# Altium PCB GroundStation.PcbDoc
Units mil, origin at the board's own origin, x right, y up, seen from the top; angles counter-clockwise.
Board outline 4957.4 x 4050 mil, 2 copper layers (Top Layer, Bottom Layer); 121 components, 93 nets, 417 pads, 95 vias.
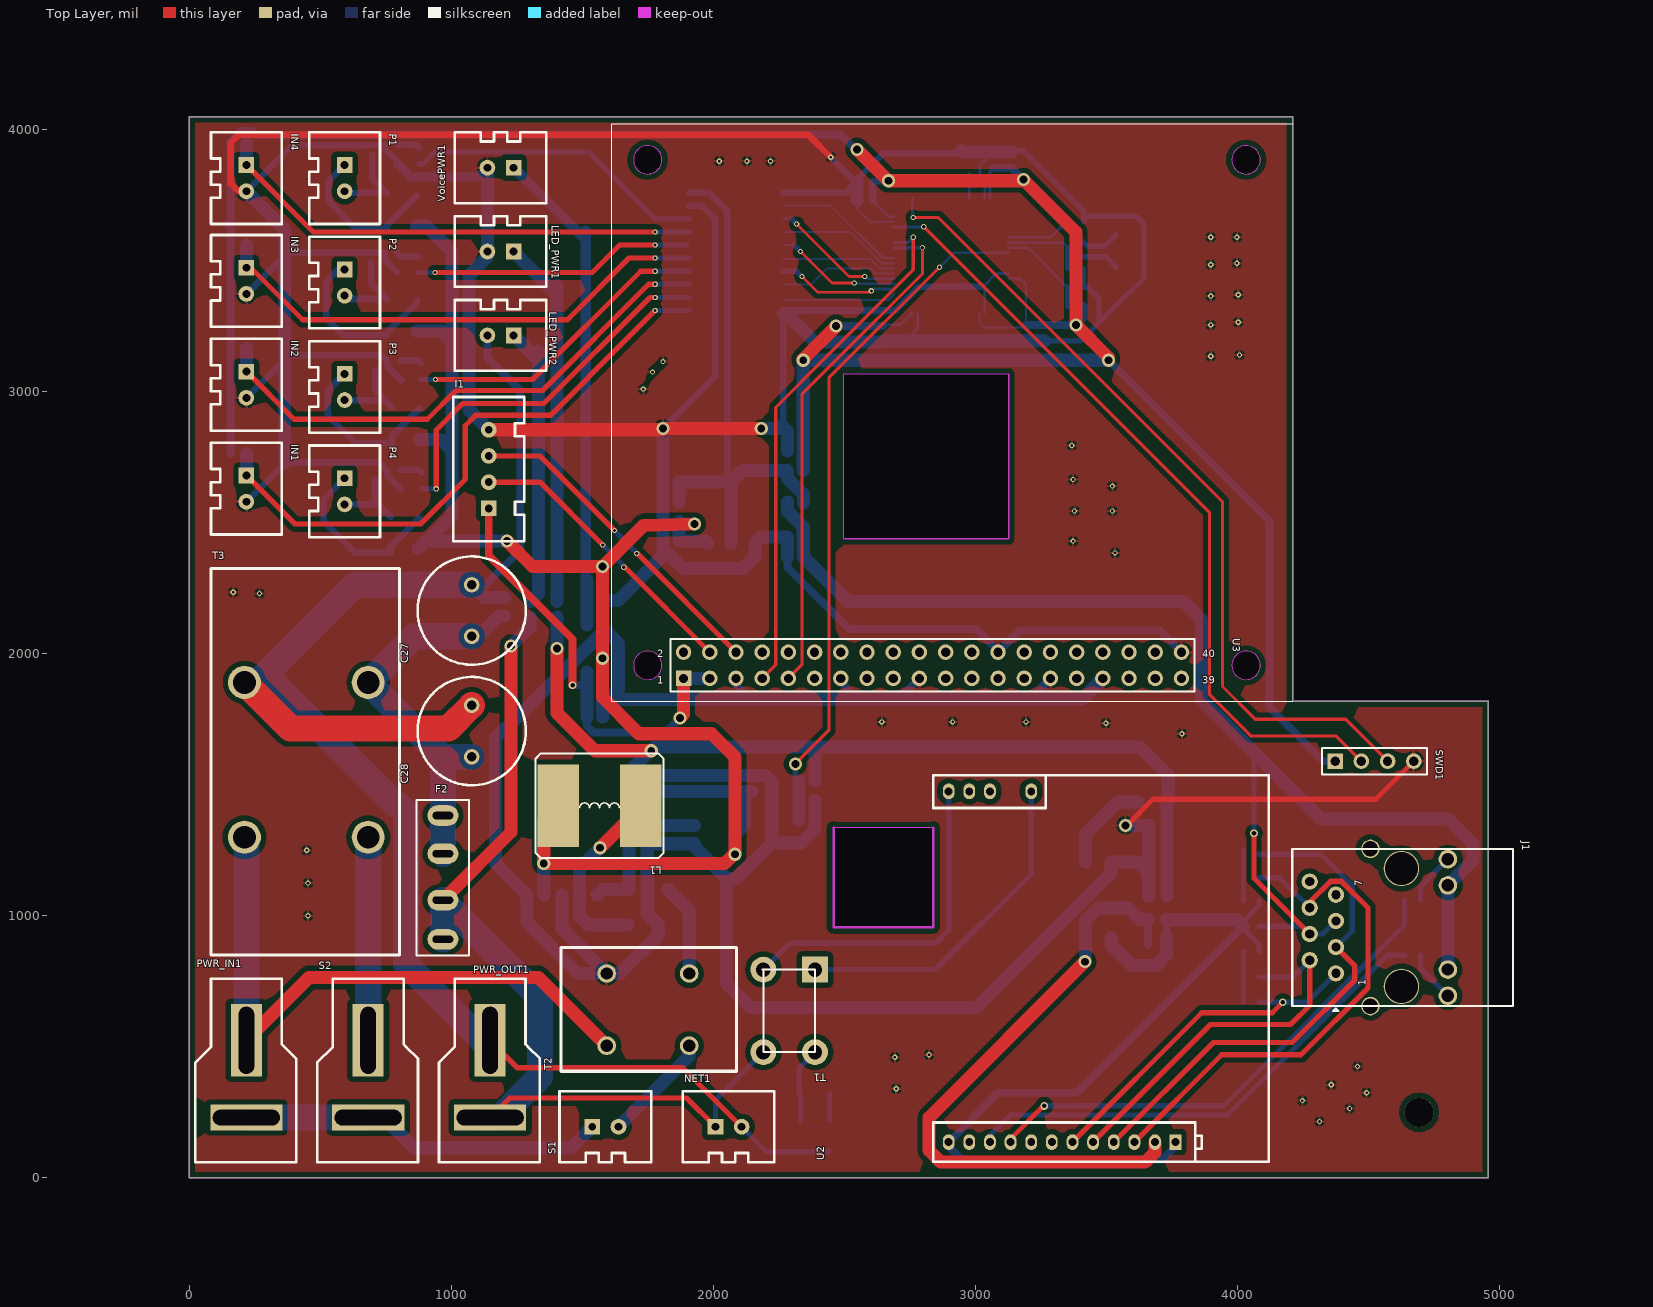
[diagram p0: Top Layer view]
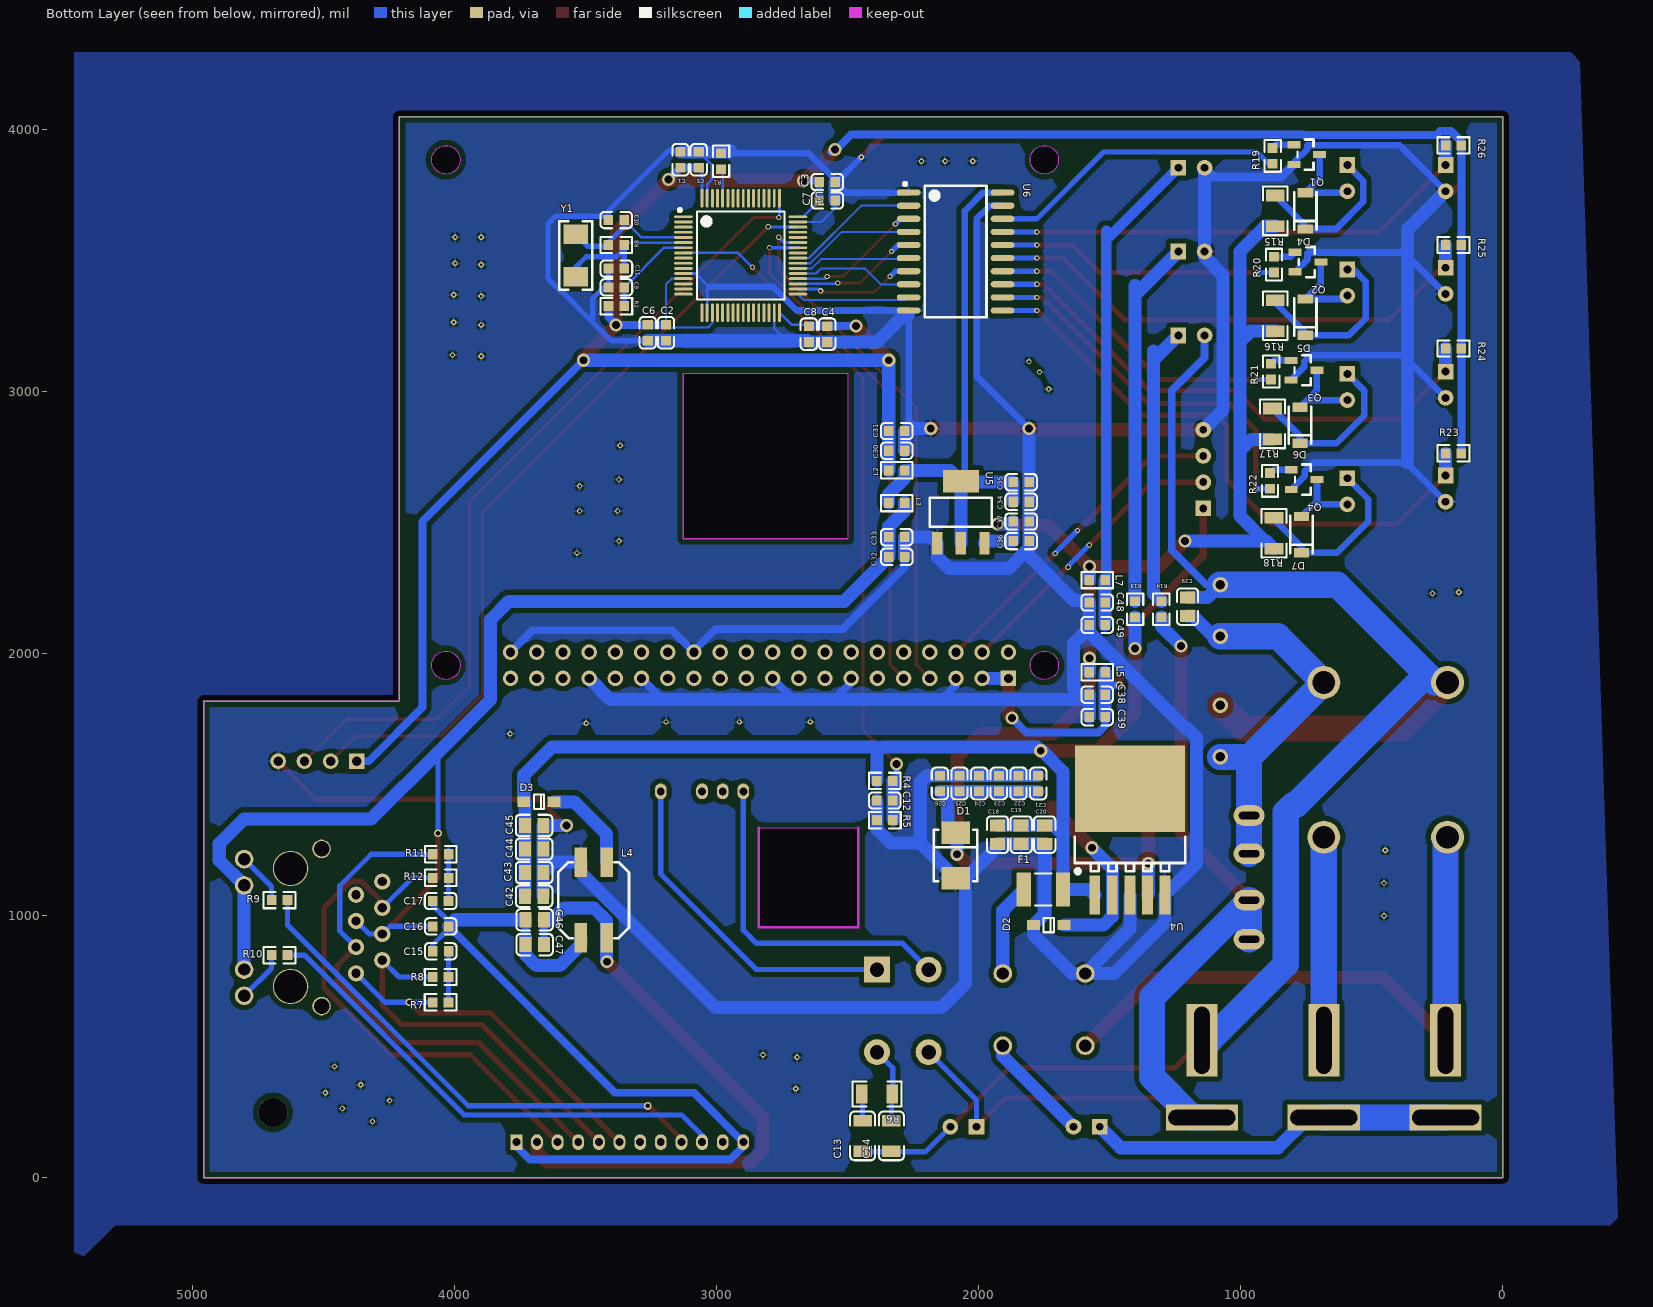
[diagram p1: Bottom Layer view, seen from below]
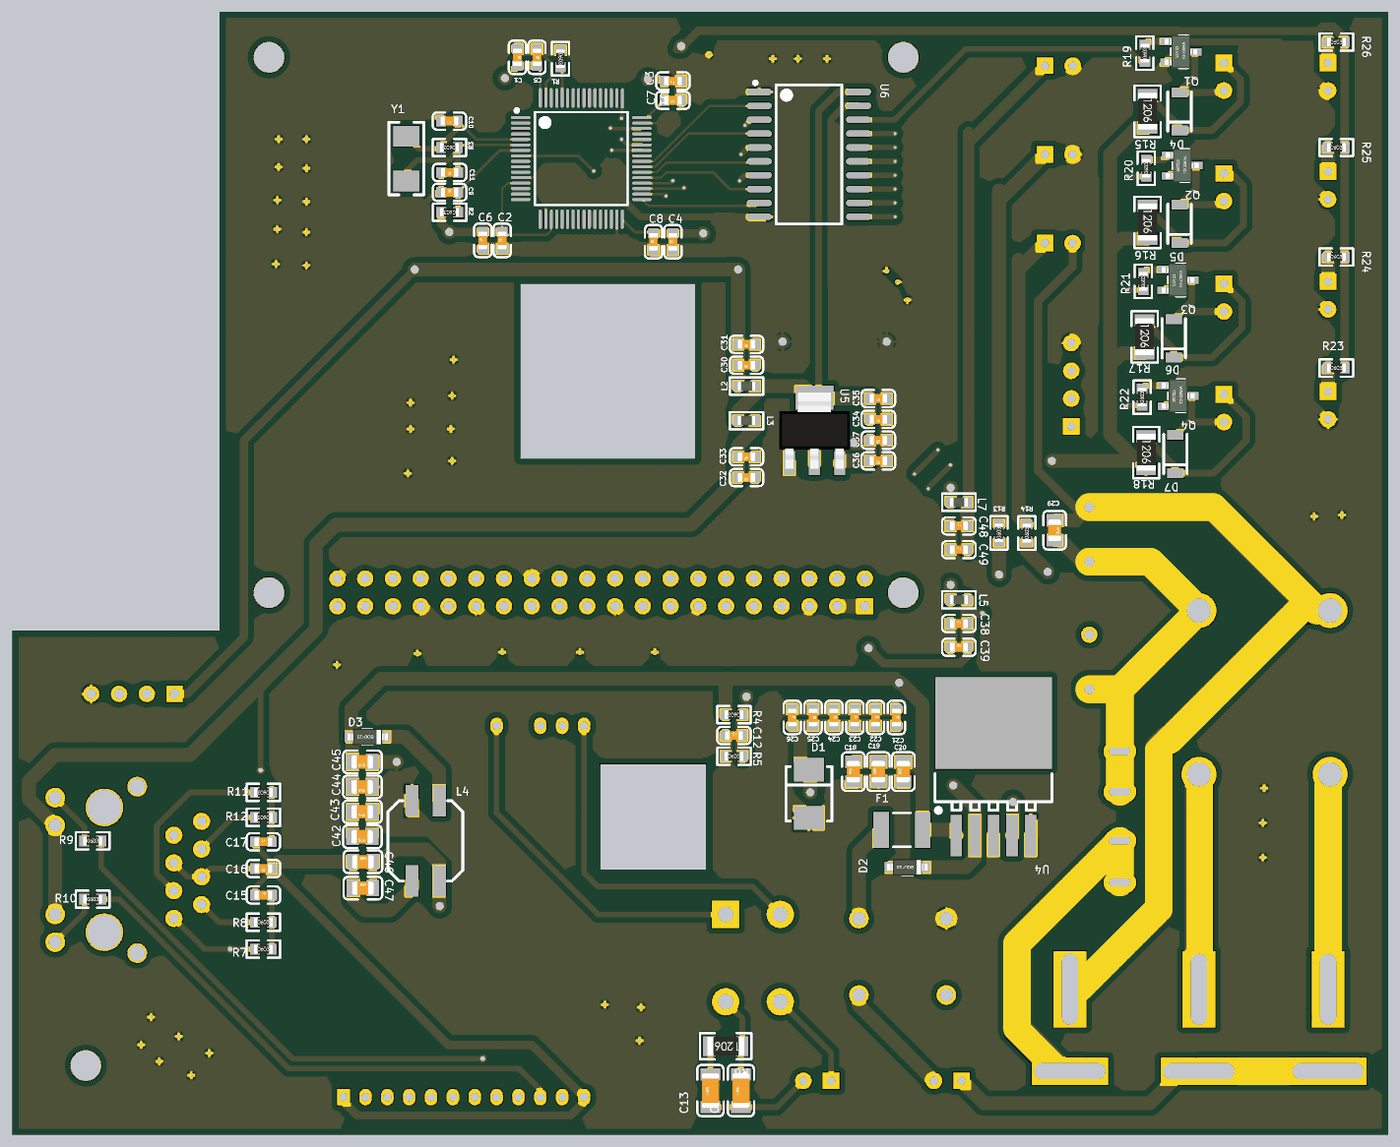
[diagram p2: 3D render of the assembled board from below, using the file's embedded part models]

## Layer stack, top to bottom
Top Solder: solder mask 0.4, Solder Resist, Dk 3.5
Top Layer: signal copper 1.4
Dielectric 1: dielectric 12.6, FR-4, Dk 4.8
Bottom Layer: signal copper 1.4
Bottom Solder: solder mask 0.4, Solder Resist, Dk 3.5

## Board outline
0,0 0,4050 4209.37,4050 4209.37,1818.07 4957.4,1818.07 4957.2,1817.87 4957.2,0
cut-out: 2496.77,3068.07 3126.69,3068.07 3126.69,2438.15 2498.62,2438.15 2496.77,2440
cut-out: 2458.39,956.42 2838.39,956.42 2838.39,1336.42 2458.39,1336.42

## Design rules (kind name [scope] priority, off if disabled: settings)
Clearance [All] p1: gap=8 ignorepadtopadclearanceinfootprint=FALSE
PolygonConnect [All] p1: connectstyle=Relief reliefconductorwidth=10 reliefentries=4 polygonreliefangle="90 Angle" airgapwidth=10
RoutingVias [All] p1: holewidth=28 width=50 viastyle="Through Hole" minholewidth=28 minwidth=50 maxholewidth=28 maxwidth=50
SolderMaskExpansion [All] p1: expansion=4
Width [All] p1: maxlimit=3937.01 minlimit=6 preferedwidth=20
30 further rules are at their usual default settings.

## Classes and differential pairs
component class MCU: C1 C2 C3 C4 C5 C6 C7 C8 C9 C10 C11 C12 R1 R2 R3 R4 R5 SWD1 U1 Y1
component class PLC_RaspberryPi: C13 C14 C15 C16 C17 I1 J1 NET1 R6 R7 R8 R9 R10 R11 R12 T1 U2 U3
component class Power: C18 C19 C20 C21 C22 C23 C24 C25 C26 C27 C28 C29 C30 C31 C32 C33 C34 C35 C36 C37 C38 C39 C42 C43 C44 C45 C46 C47 C48 C49 D1 D2 D3 F1 F2 L1 L2 L3 L4 L5 L7 LED_PWR1 LED_PWR2 PWR_IN1 PWR_OUT1 R13 R14 S1 S2 T2 T3 U4 U5 VoicePWR1
component class State: D4 D5 D6 D7 IN1 IN2 IN3 IN4 P1 P2 P3 P4 Q1 Q2 Q3 Q4 R15 R16 R17 R18 R19 R20 R21 R22 R23 R24 R25 R26 U6

## Components (designator, comment, footprint, x,y, rotation, side; value= is the part's Value field where it differs from the comment)
C1 "0.1uF (104) 10% 16V" 0603_C 3137.2,3885 r270 bottom
C2 "0.1uF (104) 10% 16V" 0603_C 3192.2,3225 r90 bottom
C3 "0.1uF (104) 10% 16V" 0603_C 2577.2,3800 r0 bottom
C4 "0.1uF (104) 10% 16V" 0603_C 2577.2,3220 r90 bottom
C5 "1uF (105) 10% 50V" 0603_C 3067.2,3885 r270 bottom
C6 "1uF (105) 10% 50V" 0603_C 3262.2,3225 r90 bottom
C7 "1uF (105) 10% 50V" 0603_C 2577.2,3730 r0 bottom
C8 "1uF (105) 10% 50V" 0603_C 2647.2,3220 r90 bottom
C9 "1uF (105) 10% 50V" 0603_C 3381.57,3398.33 r180 bottom
C10 "20pF 10%" 0603_C 3382.2,3655 r0 bottom
C11 "20pF 10%" 0603_C 3381.57,3470 r0 bottom
C12 "0.1uF (104) 10% 50V" 0603_C 2357.2,1440 r180 bottom
C13 "0.01uF (103) 10% 200V" 1206_C 2442.2,160 r90 bottom
C14 "0.01uF (103) 10% 200V" 1206_C 2332.2,160 r90 bottom
C15 "100nF(104) 10% 50V" 0603_C 4052.2,865 r180 bottom
C16 "100nF(104) 10% 50V" 0603_C 4052.2,960 r0 bottom
C17 "100nF(104) 10% 50V" 0603_C 4052.52,1056.67 r180 bottom
C18 "22uF (226) 20% 25V" 0805_C 1927.2,1310 r90 bottom
C19 "22uF (226) 20% 25V" 0805_C 1837.2,1309.96 r90 bottom
C20 "0.1uF (104) 10% 50V" 0805_C 1747.2,1310 r90 bottom
C21 "10uF (106) 10% 10V" 0603_C 1772.2,1505 r270 bottom
C22 "10uF (106) 10% 10V" 0603_C 1847.2,1505 r270 bottom
C23 "10uF (106) 10% 10V" 0603_C 1922.2,1505 r270 bottom
C24 "10uF (106) 10% 10V" 0603_C 1997.2,1505 r270 bottom
C25 "10uF (106) 10% 10V" 0603_C 2072.2,1505 r270 bottom
C26 "0.1uF (104) 10% 16V" 0603_C 2147.2,1505 r270 bottom
C27 "Cap Pol1" RB5-10.5 1077.2,2165 r90 top
C28 "Cap Pol1" RB5-10.5 1077.2,1705 r90 top
C29 "0.1uF (104) 10% 50V" 0805_C 1202.2,2180 r270 bottom
C30 "10uF (106) 10% 10V" 0603_C 2311.89,2775 r0 bottom
C31 "100nF (104) 10% 50V" 0603_C 2311.89,2850 r0 bottom
C32 "10uF (106) 10% 10V" 0603_C 2311.89,2370 r0 bottom
C33 "100nF (104) 10% 50V" 0603_C 2312.2,2445 r0 bottom
C34 "10uF (106) 10% 10V" 0603_C 1837.2,2580 r0 bottom
C35 "100nF (104) 10% 50V" 0603_C 1837.2,2655 r0 bottom
C36 "10uF (106) 10% 10V" 0603_C 1837.2,2430 r0 bottom
C37 "100nF (104) 10% 50V" 0603_C 1837.2,2505 r0 bottom
C38 "10uF (106) 10% 10V" 0603_C 1546.89,1843.75 r180 bottom
C39 "100nF (104) 10% 50V" 0603_C 1546.89,1758.12 r180 bottom
C42 "0.1uF (104) 10% 50V" 0805_C 3695.83,1075 r0 bottom
C43 "22uF (226) 20% 25V" 0805_C 3695.83,1165 r0 bottom
C44 "22uF (226) 20% 25V" 0805_C 3695.83,1255 r0 bottom
C45 "22uF (226) 20% 25V" 0805_C 3695.83,1345 r0 bottom
C46 "22uF (226) 20% 25V" 0805_C 3693.58,985 r180 bottom
C47 "0.1uF (104) 10% 50V" 0805_C 3693.58,890 r180 bottom
C48 "10uF (106) 10% 10V" 0603_C 1546.89,2195.62 r180 bottom
C49 "100nF (104) 10% 50V" 0603_C 1546.89,2110 r180 bottom
D1 "P6SMB6.8CA" SMB(DO-214AA)_S1 2087.2,1230 r270 bottom
D2 "B5819W  SL" SOD-123 1732.2,965 r0 bottom
D3 "B5819W  SL" SOD-123 3677.2,1435 r0 bottom
D4 "LL4148 LL-34 1206" LL-34 752.2,3690 r90 bottom
D5 "LL4148 LL-34 1206" LL-34 752.2,3285 r90 bottom
D6 "LL4148 LL-34 1206" LL-34 772.99,2872.13 r90 bottom
D7 "LL4148 LL-34 1206" LL-34 767.2,2454.72 r90 bottom
F1 "0.5A 1812" 1812 1752.2,1100 r180 bottom
F2 "20A" Fuse_Small 967.2,1382.83 r270 top
I1 "Header 4" XH2.54_4P 1142.2,2555 r90 top
IN1 "Header 2" XH2.54_2P 217.2,2680 r270 top
IN2 "Header 2" XH2.54_2P 217.2,3076.67 r270 top
IN3 "Header 2" XH2.54_2P 217.2,3473.33 r270 top
IN4 "Header 2" XH2.54_2P 217.2,3865 r270 top
J1 "RJ45_HR911105A" RJ45_3 4625.04,955.63 r0 top locked
L1 "Inductor" L1050(10x10x4) 1564.72,1420 r180 top
L2 "Inductor" 0603_L 2311.89,2700 r0 bottom
L3 "Inductor" 0603_L 2312.2,2575 r180 bottom
L4 "B82793S0513N201" B82793S0513N201_Yes 3418.78,1205 r270 bottom
L5 "Inductor" 0603_L 1546.89,1929.37 r180 bottom
L7 "Inductor" 0603_L 1546.89,2281.25 r180 bottom
LED_PWR1 "Header 2" XH2.54_2P 1237.2,3535 r180 top
LED_PWR2 "Header 2" XH2.54_2P 1237.2,3215 r180 top
NET1 "Header 2" XH2.54_2P 2007.2,195 r0 top
P1 "Header 2" XH2.54_2P 592.2,3865 r270 top
P2 "Header 2" XH2.54_2P 592.2,3466.67 r270 top
P3 "Header 2" XH2.54_2P 592.2,3068.33 r270 top
P4 "Header 2" XH2.54_2P 592.2,2670 r270 top
PWR_IN1 "Header 2" T型口 227.2,525 r0 top
PWR_OUT1 "Header 2" T型口 1157.2,525 r0 top
Q1 "SS8050 Y1" SOT-23(SOT-23-3) 747.2,3905 r0 bottom
Q2 "SS8050 Y1" SOT-23(SOT-23-3) 742.2,3495 r0 bottom
Q3 "SS8050 Y1" SOT-23(SOT-23-3) 757.99,3082.13 r0 bottom
Q4 "SS8050 Y1" SOT-23(SOT-23-3) 757.2,2664.72 r0 bottom
R1 "100K(104),1%" 0603_R 2982.2,3880 r270 bottom
R2 "10K(103),1%" 0603_R 3381.57,3326.67 r0 bottom
R3 "1M(105),1%" 0603_R 3382.2,3560 r0 bottom
R4 "47K(473),1%" 0603_R 2357.2,1515 r0 bottom
R5 "10KΩ (1002) ±1%" 0603_R 2356.89,1365 r180 bottom
R6 "100K(104),1%" 1206_R 2387.2,320 r0 bottom
R7 "49.9Ω (49R9) ±1%" 0603_R 4052.52,670 r180 bottom
R8 "49.9Ω (49R9) ±1%" 0603_R 4052.52,766.67 r180 bottom
R9 "1KΩ (1001) ±1%" 0603_R 4667.2,1060 r180 bottom
R10 "1KΩ (1001) ±1%" 0603_R 4667.2,850 r180 bottom
R11 "49.9Ω (49R9) ±1%" 0603_R 4052.2,1235 r0 bottom
R12 "49.9Ω (49R9) ±1%" 0603_R 4052.2,1145 r0 bottom
R13 "2KΩ (2001) ±1%" LC-0603_R 1402.2,2170.31 r90 bottom
R14 "2KΩ (2001) ±1%" LC-0603_R 1302.2,2170 r90 bottom
R15 "10Ω (10R0) ±1%" 1206_R 867.2,3690 r270 bottom
R16 "10Ω (10R0) ±1%" 1206_R 867.2,3290 r270 bottom
R17 "10Ω (10R0) ±1%" 1206_R 877.99,2877.13 r270 bottom
R18 "10Ω (10R0) ±1%" 1206_R 872.2,2460 r270 bottom
R19 "1KΩ (1001) ±1%" 0603_R 877.2,3900 r90 bottom
R20 "1KΩ (1001) ±1%" 0603_R 872.2,3485.31 r90 bottom
R21 "1KΩ (1001) ±1%" 0603_R 882.99,3077.13 r90 bottom
R22 "1KΩ (1001) ±1%" 0603_R 887.2,2659.72 r90 bottom
R23 "5.1KΩ (5101) ±1%" LC-0603_R 187.2,2765 r180 bottom
R24 "5.1KΩ (5101) ±1%" LC-0603_R 187.2,3165 r180 bottom
R25 "5.1KΩ (5101) ±1%" LC-0603_R 187.2,3560 r180 bottom
R26 "5.1KΩ (5101) ±1%" LC-0603_R 187.2,3940 r180 bottom
S1 "SW-SPST" XH2.54_2P 1537.2,195 r0 top
S2 "SW-SPST" T型口 692.2,525 r0 top
SWD1 "Header 4" HDR1X4 4372.2,1590 r0 top
T1 "Trans" SW-80 2387.2,795 r270 top
T2 "Trans" UU9.8 1907.17,504.41 r90 top
T3 "Trans" 20A共模电感 682.2,1300 r90 top
U1 "STM32F103RET6" LQFP-64_10x10x05P 2907.2,3520 r270 bottom
U2 "LAN Adapter" "LAN Adapter" 3763.39,136.42 r90 top locked
U3 "Raspberry3B" HDR2X20 1885.63,1906.07 r0 top locked
U4 "LM2596" TO-263-5 1422.2,1079.49 r270 bottom
U5 "AMS1117-3.3" SOT-223 2067.2,2540 r270 bottom
U6 "SN74HC244" SOIC-20_300mil 2087.2,3535 r270 bottom
VoicePWR1 "Header 2" XH2.54_2P 1237.2,3855 r180 top
Y1 "8MHz ±20ppm 20pF" SMD-5032_2P 3537.2,3520 r90 bottom

## Footprints (in the part's own frame and the unit in brackets; to place one, negate y for a bottom-side part, rotate by r counter-clockwise, add the part's x,y. Pads: shape width x height; smd on the part's side, far side on the other; paste and mask are expansions set on the pad)
20A共模电感 [mm]
  round 3.2 hole 2.2: 1(0,12) 2(15,12) 3(0,0) 4(15,0)
  silkscreen extent -11.43,-3.05 26.04,15.24
0603_C [mm]
  rect 0.93x0.98 smd: 1(-0.77,0) 2(0.77,0)
  silkscreen extent -1.53,-0.79 1.54,0.79, body extent -0.8,-0.4 0.8,0.4, height 0.3
0603_L [mm]
  rect 0.93x0.98 smd: 1(-0.77,0) 2(0.77,0)
  silkscreen extent -1.53,-0.79 1.54,0.79, body extent -0.8,-0.41 0.8,0.41, height 0.46
0603_R [mm]
  rect 0.93x0.98 smd: 1(-0.77,0) 2(0.77,0)
  silkscreen extent -1.53,-0.79 1.54,0.79, body extent -0.85,-0.4 0.85,0.4, height 0.56
0805_C [mm]
  rect 1.16x1.47 smd: 1(-0.89,0) 2(0.89,0)
  silkscreen extent -1.77,-1.04 1.77,1.04, body extent -1,-0.63 1,0.63, height 0.77
1206_C [mm]
  rect 1.13x1.8 smd: 1(-1.49,0) 2(1.49,0)
  silkscreen extent -2.36,-1.2 2.35,1.2, body extent -1.6,-0.81 1.6,0.79, height 1
1206_R [mm]
  rect 1.13x1.8 smd: 1(-1.49,0) 2(1.49,0)
  silkscreen extent -2.36,-1.2 2.35,1.2, body extent -1.7,-0.86 1.65,0.87, height 0.85
1812 [mm] "Chip Capacitor, Body 4.5x3.2mm, IPC High Density"
  rect 1.4x3.3 smd: 1(-1.9,0) 2(1.9,0)
  silkscreen extent -0.8,-1.55 0.8,1.55, body extent -2.4,-1.7 2.4,1.7, height 1.4
B82793S0513N201_Yes [mm]
  rect 2.85x1.2 smd: 1(0,0) 2(7.35,0) 3(7.35,-2.5) 4(0,-2.5)
  silkscreen extent 0,-4.7 7.37,2.16
Fuse_Small [mm]
  oval 2x3 hole 0.7 slot 2 at 90 deg: 1(0,0) 1(3.7,0) 2(8.2,0) 2(12,0)
  silkscreen extent -1.52,-2.54 13.59,2.54
HDR1X4 [mm] "Connector; Header; 4 Position"
  rect 1.5x1.5 hole 0.9: 1(0,0)
  round 1.5 hole 0.9: 2(2.54,0) 3(5.08,0) 4(7.62,0)
  silkscreen extent -1.27,-1.27 8.89,1.27
HDR2X20 [mm] "Connector; Header; 20x2 Position"
  rect 1.5x1.5 hole 0.9: 1(0,0)
  round 1.5 hole 0.9: 2(0,2.54) 3(2.54,0) 4(2.54,2.54) 5(5.08,0) 6(5.08,2.54) 7(7.62,0) 8(7.62,2.54) 9(10.16,0) 10(10.16,2.54) 11(12.7,0) 12(12.7,2.54) 13(15.24,0) 14(15.24,2.54) 15(17.78,0) 16(17.78,2.54) 17(20.32,0) 18(20.32,2.54) 19(22.86,0) 20(22.86,2.54) 21(25.4,0) 22(25.4,2.54) 23(27.94,0) 24(27.94,2.54) 25(30.48,0) 26(30.48,2.54) 27(33.02,0) 28(33.02,2.54) 29(35.56,0) 30(35.56,2.54) 31(38.1,0) 32(38.1,2.54) 33(40.64,0) 34(40.64,2.54) 35(43.18,0) 36(43.18,2.54) 37(45.72,0) 38(45.72,2.54) 39(48.26,0) 40(48.26,2.54)
  silkscreen extent -1.27,-1.27 49.53,3.81
L1050(10x10x4) [mm] "1040"
  rect 4x8 smd: 1(-4,0) 2(4,0)
  silkscreen extent -6.22,-5.08 6.2,5.08
"LAN Adapter" [mil]
  rect 60x45 hole 30: 1(0,0)
  oval 60x45 hole 30: 2(0,78.74) 3(0,157.48) 4(0,236.22) 5(0,314.96) 6(0,393.7) 7(0,472.44) 8(0,551.18) 9(0,629.92) 10(0,708.66) 11(0,787.4) 12(0,866.14) 13(1338.58,551.18) 14(1338.58,866.14) 15(1338.58,787.4) 16(1338.58,708.66)
  Keep-Out Layer lines w10: 1200,1305 1175,1305 1140,1305 820,1305 820,925 1200,925
  silkscreen extent -75,-355 1400,925
LC-0603_R [mm]
  rect 0.93x0.98 smd: 1(-0.77,0) 2(0.77,0)
  silkscreen extent -1.53,-0.79 1.54,0.79, body extent -0.85,-0.4 0.85,0.4, height 0.56
LL-34 [mm]
  rect 0.9x1.5 smd: 1(1.75,0) 2(-1.75,0)
  silkscreen extent -1.8,-1.08 1.8,1.08
LQFP-64_10x10x05P [mm]
  oval 0.28x1.8 smd mask+0.051: 1(-3.75,-5.55) 2(-3.25,-5.55) 3(-2.75,-5.55) 4(-2.25,-5.55) 5(-1.75,-5.55) 6(-1.25,-5.55) 7(-0.75,-5.55) 8(-0.25,-5.55) 9(0.25,-5.55) 10(0.75,-5.55) 11(1.25,-5.55) 12(1.75,-5.55) 13(2.25,-5.55) 14(2.75,-5.55) 15(3.25,-5.55) 16(3.75,-5.55) 33(3.75,5.55) 34(3.25,5.55) 35(2.75,5.55) 36(2.25,5.55) 37(1.75,5.55) 38(1.25,5.55) 39(0.75,5.55) 40(0.25,5.55) 41(-0.25,5.55) 42(-0.75,5.55) 43(-1.25,5.55) 44(-1.75,5.55) 45(-2.25,5.55) 46(-2.75,5.55) 47(-3.25,5.55) 48(-3.75,5.55)
  oval 1.8x0.28 smd mask+0.051: 17(5.55,-3.75) 18(5.55,-3.25) 19(5.55,-2.75) 20(5.55,-2.25) 21(5.55,-1.75) 22(5.55,-1.25) 23(5.55,-0.75) 24(5.55,-0.25) 25(5.55,0.25) 26(5.55,0.75) 27(5.55,1.25) 28(5.55,1.75) 29(5.55,2.25) 30(5.55,2.75) 31(5.55,3.25) 32(5.55,3.75) 49(-5.55,3.75) 50(-5.55,3.25) 51(-5.55,2.75) 52(-5.55,2.25) 53(-5.55,1.75) 54(-5.55,1.25) 55(-5.55,0.75) 56(-5.55,0.25) 57(-5.55,-0.25) 58(-5.55,-0.75) 59(-5.55,-1.25) 60(-5.55,-1.75) 61(-5.55,-2.25) 62(-5.55,-2.75) 63(-5.55,-3.25) 64(-5.55,-3.75)
  silkscreen extent -4.55,-6.05 4.25,4.25
RB5-10.5 [mm] "Capacitor (Radial); 2 Leads"
  round 1.5 hole 0.9: 1(-2.5,0) 2(2.5,0)
  silkscreen extent -5.25,-5.25 5.25,5.25
RJ45_3 [mil]
  round 62 hole 35: 1(-250,-175) 2(-350,-125) 3(-250,-75) 4(-350,-25) 5(-250,25) 6(-350,75) 7(-250,125) 8(-350,175)
  round 70.87 hole 59.06: 9(-118.11,-300) 10(-118.11,300)
  round 135 hole 125: BO1(0,-225) BO2(0,225)
  round 70.87 hole 47.24: GN(177.17,260.63) GP(177.17,160.63) YN(177.17,-260.63) YP(177.17,-160.63)
  silkscreen extent -417,-319 426,300
SMB(DO-214AA)_S1 [mil]
  rect 85x107.99 smd: 1(87.01,0) 2(-87.01,0)
  silkscreen extent -98,-83 98,83
SMD-5032_2P [mm]
  rect 1.9x2.4 smd: 1(-2.05,0) 2(2.05,0)
  silkscreen extent -3.32,-1.6 3.32,1.6
SOD-123 [mm]
  rect 1.25x1 smd: 1(1.475,0) 2(-1.475,0)
  silkscreen extent -0.5,-0.7 0.5,0.7, body extent -1.85,-0.77 1.85,0.78, height 1.35
SOIC-20_300mil [mm]
  oval 0.6x2.3 smd: 1(-5.715,-4.55) 2(-4.445,-4.55) 3(-3.175,-4.55) 4(-1.905,-4.55) 5(-0.635,-4.55) 6(0.635,-4.55) 7(1.905,-4.55) 8(3.175,-4.55) 9(4.445,-4.55) 10(5.715,-4.55) 11(5.715,4.55) 12(4.445,4.55) 13(3.175,4.55) 14(1.905,4.55) 15(0.635,4.55) 16(-0.635,4.55) 17(-1.905,4.55) 18(-3.175,4.55) 19(-4.445,4.55) 20(-5.715,4.55)
  silkscreen extent -6.7,-5.05 6.38,3
SOT-23(SOT-23-3) [mm]
  rect 1.25x0.7 smd: 1(1.25,-0.95) 2(1.25,0.95) 3(-1.25,0)
  silkscreen extent -0.65,-1.46 0.9,1.46, body extent -1.5,-1.5 1.5,1.5, height 1.3
SOT-223 [mm]
  rect 2.2x1 smd: 1(3,-2.3) 2(3,0) 3(3,2.3)
  rect 2.2x3.5 smd: 2(-3,0)
  silkscreen extent -1.4,-3 1.4,3, body extent -3.49,-3.24 3.49,3.24, height 1.64
SW-80 [mm]
  rect 2.5x2.5 hole 1.4: 1(0,0)
  round 2.5 hole 1.4: 2(0,-5) 3(8,-5) 4(8,0)
  silkscreen extent 0,-5.08 8,0
TO-263-5 [mm]
  rect 8.4x10.65 smd: 0(-10.3,0)
  rect 3.8x1.05 smd: 1(0,-3.4) 2(0,-1.7) 3(0,0) 4(0,1.7) 5(0,3.4)
  silkscreen extent -5.65,-5.35 -2.1,5.35
T型口 [mm]
  rect 7x2.5 hole 1.5 slot 6.5 at 0 deg: 1(-0.254,-7.493)
  rect 3x7 hole 1.5 slot 6.5 at 90 deg: 2(-0.254,0)
  silkscreen extent -5.21,-11.81 4.57,5.97
UU9.8 [mm]
  round 1.8 hole 1.2: 1(0,8) 2(7,8) 3(0,0) 4(7,0)
  silkscreen extent -2.47,-4.57 9.53,12.43
XH2.54_2P [mil]
  rect 60x60 hole 30: 1(0,0)
  round 60 hole 30: 2(100,0)
  silkscreen extent -125,-135 225,135
XH2.54_4P [mil]
  rect 60x60 hole 30: 1(0,0)
  round 60 hole 30: 2(100,0) 3(200,0) 4(300,0)
  silkscreen extent -125,-135 425,135

## Part data
C1 C2 C3 C4 C9 C10 C11 C12 C13 C14 C20 C26 C29 C42 C47: library part Cap, "Capacitor"
C5 C6 C7 C8: library part "0603 1uF (105) 10% 50V", "贴片电容"
C15 C16 C17: library part "0805 100nF(104) 10% 50V", "贴片电容"
C18 C19 C43 C44 C45 C46: library part "0805 22uF (226) 20% 25V", "贴片电容"
C21 C22 C23 C24 C25 C30 C32 C34 C36 C38 C48: library part "0603 10uF (106) 10% 10V", "贴片电容"
C27 C28: "Polarized Capacitor (Radial)"
C31 C33 C35 C37 C39 C49: library part "0603 100nF (104) 10% 50V", "贴片电容"
D1: library part "D Schottky", "Schottky Diode"
D2 D3: library part "SOD-123 B5819W  SL", "肖特基二极管"
D4 D5 D6 D7: library part "LL-34 LL4148 LL-34 1206", "开关二极管"
F1 F2: library part "Fuse 2", "Fuse"
I1 SWD1: "Header, 4-Pin"
IN1 IN2 IN3 IN4 LED_PWR1 LED_PWR2 NET1 P1 P2 P3 P4 PWR_IN1 PWR_OUT1 VoicePWR1: "Header, 2-Pin"
Q1 Q2 Q3 Q4: library part "SOT-23 SS8050 Y1", "三极管"
R1 R2 R3 R4 R6: library part Res2, "Resistor"
R5: library part "0603 10KΩ (1002) 1%", "贴片电阻"
R7 R8 R11 R12: library part "0805 49.9Ω (49R9) 1%", "贴片电阻"
R9 R10 R19 R20 R21 R22: library part "0603 1KΩ (1001) 1%", "贴片电阻"
R13 R14: library part "0603 2KΩ (2001) 1%", "贴片电阻"
R15 R16 R17 R18: library part "1206 10Ω (10R0) 1%", "贴片电阻"
R23 R24 R25 R26: library part "0603 5.1KΩ (5101) 1%", "贴片电阻"
S1 S2: "Single-Pole, Single-Throw Switch"
T1 T2 T3: "Transformer"
U1: "ARM"
U4: library part LM2576
U5: library part LM317, "3-Terminal Adjustable Positive Voltage Regulator"
U6: "OCTAL BUF AND LIN DRV 3SO"
Y1: library part "SMD-5032_2P 8MHz 20ppm 20pF", "贴片晶振"

## Free pads (board coordinates)
  round 110 hole 110: 2(1747.2,3885) 3(4032.2,3885) 3(4692.2,250) 4(4032.2,1955) 5(1747.2,1955)

## Via types
v1: diameter 20, hole 10, Top Layer to Bottom Layer, 43 vias
v2: diameter 50, hole 30, Top Layer to Bottom Layer, 23 vias
v3: diameter 20, hole 12, Top Layer to Bottom Layer, 20 vias
v4: diameter 20, hole 13, Top Layer to Bottom Layer, 5 vias
v5: diameter 30, hole 18, Top Layer to Bottom Layer, 4 vias

## Nets (pads, with @x,y where several pads share a name; then routed paths per layer and width w, separated by ;. In a path a pad name is that pad's centre, name@x,y a point inside that pad or via, vN(x,y) a via of type N, cw(c..) or ccw(c..) an arc to the next point about the centre after c; other vN are vias at no path point)
3V3: C34.2 C35.2 L2.1 L3.1 U5.2 U6.20 | length 2102.3
  Bottom Layer w25: U6.20 1982.2,3760 2052.2,3690 U5.2@2052.2,2655
  Bottom Layer w50: C34.2 C35.2 2052.2,2655 2064.09,2655 U5.2@2067.2,2658.11 ; U5.2@2067.2,2421.89 U5.2@2067.2,2658.11 ; L3.1 2342.52,2609.69 2281.57,2670.63 L2.1 2109.09,2700 U5.2@2067.2,2658.11
3V3_Sensor: C16.2 C32.2 C33.2 J1.4 J1.5 J1.GP J1.YP L3.2 | length 5049.5
  Top Layer w20: v5(4062.2,1315) 4062.2,1143.46 J1.4
  Bottom Layer w20: v5(4062.2,1315) 4062.2,1625 ; C16.2 4245.67,960 J1.4 4325.04,930.63 J1.5
  Bottom Layer w50: L3.2@2281.89,2580 L3.2 2281.89,2545.32 2342.2,2485 C32.2 2512.2,2200 3792.2,2200 3862.2,2130 3862.2,1825 4062.2,1625 4317.2,1370 4802.2,1370 4897.2,1275 4897.2,1211.26 J1.GP J1.YP
3V3_STM32: C1.2 C2.2 C3.2 C4.2 C5.2 C6.2 C7.2 C8.2 C30.2 C31.2 L2.2 R2.2 R23.2 R24.2 R25.2 R26.2 SWD1.1 U1.13 U1.19 U1.32 U1.48 U1.64 | length 10340.4
  Top Layer w50: v2(2342.2,3120) 2342.2,3125 v2(2467.52,3250.31) ; v2(2547.2,3925) v2(2667.2,3805) 3177.2,3805 v2(3182.2,3810) 3382.52,3609.69 v2(3382.52,3255.31) 3507.2,3130.63 v2(3507.2,3120)
  Bottom Layer w8: U1.19 3015.47,3261.73 3032.2,3245 3181.89,3245 C2.2 3192.2,3410 3170.79,3431.42 U1.13
  Bottom Layer w10: C7.2 2669.88,3667.64 U1.48 ; C8.2 2651.89,3255 2712.24,3255 U1.32@2758.74,3301.5 ; U1.64 3054.84,3842.32 C5.2
  Bottom Layer w30: R23.2 R24.2 R25.2 R26.2 156.89,3955.08 196.81,3995 238.23,3995 253.23,3980 760.27,3980 761.46,3981.18 2486.02,3981.18 2552.2,3915 v2@2562.2,3915 ; v2(2467.52,3250.31) C4.2 C8.2 ; C7.2 C3.2 ; 2627.52,3805 v2(2667.2,3805) ; C5.2 C1.2 v2@3171.89,3820 ; C2.2 C6.2 v2(3382.52,3255.31) 3411.89,3284.69 R2.2 ; v2(3507.2,3120) 4122.2,2505 4122.2,1795 4327.2,1590 SWD1.1
  Bottom Layer w50: L2.2 C30.2 C31.2 v2(2342.2,3120) v2(3507.2,3120)
5V: C21.2 C22.2 C23.2 C24.2 C25.2 C26.2 C36.2 C37.2 D1.2 L1.2 L5.1 L7.1 R15.2 R16.2 R17.2 R18.2 U4.4 U5.3 | length 6324.7
  Top Layer w50: v2@1211.49,2430.71 v2(1212.2,2430) 1309.08,2333.12 v2(1576.89,2333.12) ; L1.2 1352.2,1364.96 v2(1352.2,1200) 2042.2,1200 v2@2072.2,1230 ; v2(1927.2,2495) 1733.76,2490 v2(1576.89,2333.12) ; v2(2082.2,1235) 2082.2,1605 1992.2,1695 1715.01,1695 1576.89,1833.12 v2(1576.89,1983.12) v2(1576.89,2333.12)
  Bottom Layer w50: R16.2 960.87,3231.34 1002.2,3190 ; R15.2 905.87,3631.34 1002.2,3535 1002.2,3190 ; R18.2 900.87,2430 912.2,2430 ; R17.2 958.74,2818.46 1002.2,2775 ; v2@1199.13,2430 912.2,2430 ; v2(1352.2,1200) 1352.2,1082.56 U4.4 ; v2(1576.89,1983.12) 1576.89,1929.69 L5.1 ; v2(1576.89,2333.12) 1576.89,2281.56 L7.1 ; C21.2 C22.2 C23.2 C24.2 C25.2 2117.2,1474.68 ; v2(1927.2,2495) 1877.52,2495 C37.2 C36.2 1968.54,2430 U5.3 ; v2(2082.2,1235) 2082.2,1312.01 D1.2 2117.2,1347.01 2117.2,1474.68 ; C26.2 2117.2,1474.68 ; 912.2,2430 912.2,2436.06 1002.2,2526.06 1002.2,2775 ; 1002.2,2775 1002.2,3190
5V_PI: C38.2 C39.2 I1.1 L5.2 U3.1 U3.3 | length 1715.5
  Top Layer w30: I1.1 1142.2,2375 1462.2,2055 v5(1462.2,1880)
  Top Layer w50: v2(1872.2,1755) 1885.63,1768.43 U3.1
  Bottom Layer w30: v5(1462.2,1880) 1506.57,1880 1516.57,1870 ; C39.2 1516.57,1725.63 1542.2,1700 1817.2,1700 v2(1872.2,1755)
  Bottom Layer w50: C39.2 C38.2 1516.57,1870 L5.2 ; U3.1 U3.3
5V_Voice: C48.2 C49.2 L7.2 VoicePWR1.1 | length 1901
  Bottom Layer w30: L7.2@1506.89,2290.93 L7.2
  Bottom Layer w40: VoicePWR1.1 1512.2,3580 ; L7.2@1512.2,2287.81 1512.2,3580 ; 1512.2,3615 1512.2,3580
  Bottom Layer w50: C49.2 C48.2 L7.2
12V_Adapter: C46.2 C47.2 L4.2 U2.2 | length 2432.7
  Top Layer w50: v2(3417.2,825) 2822.2,230 2822.2,105 2867.2,60 3647.2,60 3684.65,97.44 U2.2
  Bottom Layer w30: C47.2 C46.2
  Bottom Layer w50: v2(3417.2,825) 3418.78,826.57 L4.2 3418.78,981.57 3467.2,1030 3582.2,1030 3627.2,985 C46.2
ADC123_IN10: C12.2 R4.1 R5.2 U1.8 | length 2630.5
  Top Layer w12: v2(2312.2,1580) 2440.1,1707.9 2440.1,3052.9 v4(2862.2,3475)
  Bottom Layer w10: v4(2862.2,3475) 2917.05,3529.84 U1.8
  Bottom Layer w20: v2(2312.2,1580) 2312.2,1530.31 2327.2,1515.31 R4.1
  Bottom Layer w50: R5.2 2326.57,1514.68 R4.1
BOOT0: R1.2 U1.60 | length 92.3
  Bottom Layer w10: U1.60 2976.1,3830.79
ETH: R10.2 U2.10 | length 1893
  Bottom Layer w20: U2.10 3054.72,162.52 3132.2,240 3962.2,240 4572.2,850 R10.2
GND: C1.1 C2.1 C3.1 C4.1 C5.1 C6.1 C7.1 C8.1 C9.1 C10.2 C11.2 C12.1 C18.1 C19.1 C20.1 C21.1 C22.1 C23.1 C24.1 C25.1 C26.1 C30.1 C31.1 C32.1 C33.1 C34.1 C35.1 C36.1 C37.1 C38.1 C39.1 C42.1 C43.1 C44.1 C45.1 C48.1 C49.1 D1.1 D2.1 I1.4 IN1.2 IN2.2 IN3.2 IN4.2 L4.4 LED_PWR1.2 Q1.2 Q2.2 Q3.2 Q4.2 R1.1 R5.1 SWD1.4 T2.2 U1.12 U1.18 U1.31 U1.47 U1.63 U3.5 U3.13 U3.19 U3.26 U3.29 U3.33 U3.40 U4.3 U4.5 U5.1 U6.1 U6.10 U6.19 VoicePWR1.2 | length 30421.9
  Top Layer w20: v2(3572.2,1345) 3577.2,1345 3677.2,1445 4527.2,1445 SWD1.4
  Top Layer w25: IN4.2 187.2,3765 157.2,3795 157.2,3950 187.2,3980 2362.2,3980 v1(2447.2,3895)
  Top Layer w50: I1.4 1807.2,2855 v2(1807.2,2860) v2(2182.2,2860)
  Bottom Layer w8: C7.1 2546.89,3700.31 2599.25,3647.95 U1.47
  Bottom Layer w10: 2731.89,3194.69 2779.25,3242.05 U1.31 ; U1.18 3035.16,3407.95 3078.31,3451.1 U1.12 ; U1.63 3035.16,3779.69 3034.84,3780 3034.84,3792.36 3016.89,3810.31 3016.89,3865 C5.1
  Bottom Layer w20: 3111.89,3920 3181.89,3920 3412.52,3689.37 C10.2@3412.52,3670 ; C6.1 3401.89,3194.69 3472.2,3265 ; C11.2 C9.1 3428.87,3398.33 3472.2,3355 3472.2,3265 ; C10.2@3412.52,3650 C10.2 C10.2@3412.52,3670 ; C10.2@3412.52,3670 3612.2,3670 3642.2,3640 3642.2,3431.36 3592.73,3381.89 3589.09,3381.89 3472.2,3265
  Bottom Layer w25: IN1.2 367.2,2730 722.2,2730 755.1,2697.11 755.1,2678.64 Q4.2 ; IN2.2 362.2,3121.67 380.54,3140 732.2,3140 755.89,3116.32 755.89,3096.04 Q3.2 ; IN3.2 362.2,3518.33 375.15,3531.28 740.93,3531.28 744.31,3527.89 744.31,3504.7 Q2.2 ; IN4.2 393.2,3940.99 663.78,3940.99 664.07,3941.28 731.92,3941.28 732.2,3940.99 745.1,3940.99 745.1,3927.11 749.31,3922.89 749.31,3919.3 762.49,3906.12 766.08,3906.12 796.42,3875.79 Q1.2 ; v2(1807.2,2860) 2007.2,3060 2007.2,3660 1957.2,3710 U6.19 ; 2266.34,3295 2266.34,2865.24 C31.1 ; U6.10 2693.05,3310 2783.05,3400 3027.2,3400 ; U6.1 2506.89,3760 C3.1 ; v1(2447.2,3895) 2542.2,3800 C3.1 ; R1.1 2648.42,3910.31 2546.89,3808.79 C3.1
  Bottom Layer w30: U3.5 2085.63,1881.57 2142.2,1825 ; C32.1 2281.57,2330.63 2517.2,2095 3002.2,2095 3085.63,2011.57 U3.26 3169.56,2090 3701.7,2090 U3.40 ; U3.13 2485.63,1891.57 2547.2,1830 2709.56,1830 U3.19 ; 3204.56,1825 U3.29
  Bottom Layer w35: Q1.2 844.02,3820 1102.2,3820 VoicePWR1.2
  Bottom Layer w50: IN4.2 362.2,3620 362.2,3518.33 362.2,3121.67 362.2,2735 367.2,2730 ; VoicePWR1.2 LED_PWR1.2 1137.2,3515 1067.2,3445 1067.2,2930 I1.4 ; U4.3 1422.2,950 T2.2 ; C39.1 C38.1 ; C21.1 C22.1 C23.1 C24.1 C25.1 C26.1 2196.89,1535.32 2222.2,1510 2222.2,1277.99 ; C18.1@1912.2,1274.96 C20.1 1747.2,1008.07 D2.1 1790.28,928.07 1642.2,780 T2.2 ; C18.1 1917.24,1274.96 D1.1@2049.21,1142.99 ; D1.1@2067.2,1142.99 D1.1@2049.21,1142.99 ; D1.1 2222.2,1277.99 ; v2(2182.2,2860) 2251.57,2860 2261.57,2870 C31.1@2266.34,2865.24 ; 2266.34,3295 2281.34,3295 2386.65,3189.69 C4.1 C8.1 2652.2,3194.69 2731.89,3194.69 C2.1 C6.1 ; C32.1 2281.57,2444.68 C33.1 2180.87,2445 U5.1 2157.76,2370.55 2112.2,2325 1885.42,2325 1807.52,2402.9 1807.52,2429.37 C36.1 ; C30.1 C31.1 ; C12.1 2387.52,1365.32 R5.1 2387.2,1330 2335.2,1277.99 2222.2,1277.99 ; C7.1 C3.1 ; 2947.2,3920.31 2952.2,3915.31 C5.1 C1.1 ; U3.33 3404.56,1825 3204.56,1825 2142.2,1825 1594.08,1825 1637.2,1868.12 1637.2,2040 1577.2,2100 C49.1 ; v2(3572.2,1345) C45.1 C44.1 C43.1 ; C42.1 C43.1 ; C49.1 C48.1 1584.7,2203.12 1635.33,2203.12 1806.89,2374.68 C36.1 ; C49.1 1576.57,2109.37 1576.57,2082.9 1208.67,1715 1202.2,1715 1167.2,1680 1167.2,1200.63 U4.5 1288.35,973.86 1482.2,780 T2.2 ; C36.1 C37.1 C34.1 C35.1 1807.52,2655.63 1807.52,2784.68 ; 1807.52,2784.68 1807.2,2785 v2(1807.2,2860) 1807.52,2859.68 1807.52,2784.68 ; D1.1@2049.21,1142.99 2049.21,742.99 2142.2,650 3002.2,650 3517.2,1165 L4.4 3620.79,1205 C43.1
  other v1: 4312.2,215 4427.2,265 4247.2,295 4492.2,325 2697.2,340 4357.2,355 4457.2,425 2692.2,460 2822.2,470 452.2,1000 452.2,1125 447.2,1250 3787.2,1695 3497.2,1735 2642.2,1740 2912.2,1740 3192.2,1740 267.2,2230 167.2,2235 3532.2,2385 3372.2,2430 3377.2,2545 3522.2,2545 3522.2,2640 3372.2,2665 3367.2,2795 1732.2,3010 1767.2,3075 1807.2,3115 3897.2,3135 4007.2,3140 3897.2,3255 4002.2,3265 3897.2,3365 4002.2,3370 3897.2,3485 3997.2,3490 3897.2,3590 3997.2,3590 2022.2,3880 2127.2,3880 2217.2,3880
GND_Adapter: C15.1 C16.1 C17.1 C46.1 C47.1 L4.3 U2.1 U2.12 | length 3372.1
  Bottom Layer w20: C15.1 4082.52,889.68 4021.89,950.32 C16.1 4021.89,979.68 4082.83,1040.63 C17.1
  Bottom Layer w30: 3728.62,920 C46.1 ; U2.1 3763.39,121.18 3712.2,70 2947.2,70 2897.24,119.96 U2.12 3085.83,325 3386.89,325 C16.1
  Bottom Layer w50: L4.3 3517.2,890 3597.2,810 3687.2,810 3728.62,851.42 C47.1 3728.62,920 ; C46.1 3996.89,985 C16.1
I2C1_SCL: U1.58
I2C1_SDA: U1.59
I2C2_SCL: U1.29
I2C2_SDA: U1.30
IN1: U1.33 U6.9 | length 435.8
  Bottom Layer w8: U6.9 2276.34,3350 2666.34,3350 U1.33
IN2: U1.34 U6.7 | length 460.5
  Top Layer w10: v3(2337.2,3440) 2397.2,3380 2597.2,3380 v3(2602.2,3385)
  Bottom Layer w10: v3(2602.2,3385) 2609.25,3392.05 U1.34
  Bottom Layer w20: U6.7 2317.2,3460 v3(2337.2,3440)
IN3: U1.35 U6.5 | length 483.8
  Top Layer w10: v3(2332.2,3535) 2452.2,3415 v3(2537.2,3415)
  Bottom Layer w8: U6.5 U6.5@2307.2,3560
  Bottom Layer w10: v3(2537.2,3415) 2540.47,3411.73 U1.35
  Bottom Layer w20: U6.5@2307.2,3560 v3(2332.2,3535)
IN4: U1.36 U6.3 | length 517
  Top Layer w10: v3(2317.2,3640) 2517.2,3440 v3(2577.2,3440)
  Bottom Layer w8: U6.3 U6.3@2297.2,3660
  Bottom Layer w10: v3(2577.2,3440) 2585.79,3431.42 U1.36
  Bottom Layer w20: U6.3@2297.2,3660 v3(2317.2,3640)
KEY: U2.11
LED_PWR1+: C18.2 C19.2 C20.2 C42.2 C43.2 C44.2 C45.2 D3.1 F1.2 R4.2 R13.1 U4.1 | length 4373
  Top Layer w50: v2(1402.2,2020) 1402.2,1775 1547.2,1630 v2(1762.2,1630)
  Bottom Layer w50: v2(1402.2,2020) R13.1 ; U4.1 1576.57,1100 F1.2 1677.4,1310.2 ; C18.2 C20.2 1712.24,1345.04 1677.4,1310.2 ; 2387.2,1625 2367.2,1645 1777.2,1645 v2(1762.2,1630) 1757.2,1630 1677.4,1550.2 1677.4,1310.2 ; R4.2 2387.52,1645 3627.2,1645 3735.28,1536.93 D3.1 3730.87,1430.59 C45.2 C44.2 C43.2 C42.2
NET_A: F2.2 NET1.1 PWR_OUT1.1 R14.1 T1.3 | length 3798
  Top Layer w20: PWR_OUT1.1 1222.2,305 1897.2,305 NET1.1
  Top Layer w50: F2.2@967.2,1060 1227.2,1320 v2(1227.2,2030)
  Bottom Layer w20: NET1.1 2007.2,296.89 T1.3
  Bottom Layer w50: v2(1227.2,2030) 1302.2,2105 R14.1
  Bottom Layer w100: F2.2@967.2,910.39 967.2,1060 1337.2,690 1337.2,385 1182.2,230 PWR_OUT1.1 PWR_OUT1.1@1097.2,230
NET_B: C13.1 C14.1 C27.2 C28.2 C29.1 LED_PWR2.2 NET1.2 PWR_OUT1.2 T3.2 | length 6502.7
  Top Layer w20: PWR_OUT1.2 1252.2,420 1882.2,420 NET1.2
  Top Layer w100: T3.2 385.31,1715 988.78,1715 C28.2
  Bottom Layer w20: NET1.2 2202.2,100 2440.87,100 C13.1
  Bottom Layer w30: C27.2 1130.63,2263.43 1262.2,2395 1262.2,3005 1137.2,3130 LED_PWR2.2
  Bottom Layer w50: C27.2 1125.59,2215.04 C29.1
  Bottom Layer w100: T3.2 257.76,1890.55 289.7,1922.5 ; C27.2 630.63,2263.43 289.7,1922.5 ; PWR_OUT1.2 1117.2,525 827.2,815 827.2,1395 799.21,1422.99 789.21,1422.99 289.7,1922.5
NetC13_2: C13.2 R6.2 | length 102.9
  Bottom Layer w20: C13.2 2442.2,316.34 R6.2
NetC14_2: C14.2 R6.1 T1.4 | length 288.3
  Bottom Layer w20: C14.2 2332.2,316.34 R6.1 2327.17,321.38 2327.17,420 T1.4
NetC15_2: C15.2 R7.2 R8.2 | length 195.1
  Bottom Layer w20: C15.2 4021.89,670.32 R7.2
NetC17_2: C17.2 R11.1 R12.1 | length 193.3
  Bottom Layer w20: C17.2 R11.1@4022.2,1250
NetC27_1: C27.1 C28.1 C29.2 F2.1 T3.4 | length 1507.2
  Bottom Layer w30: C27.1 C27.1@1103.78,2066.57
  Bottom Layer w50: C27.1@1103.78,2066.57 1182.17,2144.96 C29.2
  Bottom Layer w100: F2.1@967.2,1237.17 967.2,1382.83 967.2,1605.55 ; C28.1 968.23,1606.57 967.2,1605.55 ; C27.1 858.23,2066.57 T3.4 967.2,1605.55
NetD2_2: D2.2 L1.1 U4.2 | length 712.2
  Top Layer w50: v2(1567.2,1260) L1.1@1722.2,1415
  Bottom Layer w50: v2(1567.2,1260) 1489.13,1181.93 U4.2 1489.13,998.07 1522.2,965 D2.2
NetD3_2: D3.2 L4.1 | length 358.1
  Bottom Layer w50: L4.1 3418.78,1311.57 3542.2,1435 D3.2
NetD4_1: D4.1 P1.2 Q1.3 | length 320.7
  Bottom Layer w25: P1.2@606.1,3778.9 P1.2 598.31,3758.9 722.2,3758.9 ; Q1.3 697.99,3813.11 D4.1
NetD4_2: D4.2 P1.1 R15.1 | length 603.1
  Bottom Layer w25: P1.1 532.2,3805 532.2,3725 636.1,3621.1 D4.2 752.2,3633.66 R15.1
NetD5_1: D5.1 P2.2 Q2.3 | length 300.9
  Bottom Layer w25: P2.2 604.97,3353.9 722.2,3353.9 ; Q2.3 692.99,3413.11 D5.1
NetD5_2: D5.2 P2.1 R16.1 | length 666
  Bottom Layer w25: P2.1 568.87,3466.67 522.2,3420 522.2,3280 586.1,3216.1 D5.2 752.2,3225 867.2,3340 R16.1
NetD6_1: D6.1 P3.2 Q3.3 | length 321.2
  Bottom Layer w25: P3.2 745.68,2968.33 ; Q3.3 708.78,3005.24 745.68,2968.33 ; D6.1 745.68,2968.33
NetD6_2: D6.2 P3.1 R17.1 | length 651.3
  Bottom Layer w25: P3.1 527.2,3003.33 527.2,2910 633.98,2803.23 D6.2 772.99,2830.79 R17.1
NetD7_1: D7.1 P4.2 Q4.3 | length 294.3
  Bottom Layer w25: P4.2 720.83,2570 ; Q4.3 707.99,2582.83 720.83,2570 ; D7.1 720.83,2570
NetD7_2: D7.2 P4.1 R18.1 | length 680.6
  Bottom Layer w25: P4.1 512.2,2590 512.2,2505 631.38,2385.83 D7.2 767.2,2408.39 R18.1@877.2,2518.39
NetF1_1: F1.1 T2.4 | length 353.2
  Bottom Layer w50: F1.1 1907.2,1019.8 T2.4 T2.4
NetJ1_GN: J1.GN R9.1 | length 199.6
  Bottom Layer w20: R9.1 4697.52,1111.57 J1.GN
NetJ1_YN: J1.YN R10.1 | length 198.4
  Bottom Layer w20: R10.1 4697.52,799.69 J1.YN
NetLED_PWR1_1: LED_PWR1.1 R13.2 | length 1437.7
  Bottom Layer w50: LED_PWR1.1 1402.2,3370 ; R13.2 1402.2,3370 ; 1402.2,3405 1402.2,3370
NetLED_PWR2_1: LED_PWR2.1 R14.2 | length 1101.5
  Bottom Layer w50: LED_PWR2.1 1332.2,3120 ; R14.2 1332.2,2230.32 1332.2,3120 ; 1332.2,3155 1332.2,3120
NetPWR_IN1_1: PWR_IN1.1 S1.1 S2.1 | length 1400.8
  Bottom Layer w50: S2.1 742.2,230 857.2,115 1457.2,115 S1.1
  Bottom Layer w100: PWR_IN1.1 S2.1
NetPWR_IN1_2: PWR_IN1.2 T2.1 T3.1 | length 2388.6
  Top Layer w50: PWR_IN1.2 457.2,765 1331.61,765 T2.1
  Top Layer w100: PWR_IN1.2@209.76,532.44 PWR_IN1.2
  Bottom Layer w100: T3.1@204.76,1299.45 T3.1@217.2,1287.01 ; T3.1 217.2,1292.56 T3.1@217.2,1287.01 ; PWR_IN1.2 T3.1@217.2,1287.01
NetQ1_1: Q1.1 R19.2 | length 85.8
  Bottom Layer w25: Q1.1 865.12,3942.4 R19.2
NetQ2_1: Q2.1 R20.2 | length 87.7
  Bottom Layer w25: Q2.1 808.19,3515.63 R20.2
NetQ3_1: Q3.1 R21.2 | length 80.8
  Bottom Layer w25: Q3.1 870.91,3119.53 R21.2
NetQ4_1: Q4.1 R22.2 | length 85.8
  Bottom Layer w25: Q4.1 875.12,2702.13 R22.2
NetS1_2: S1.2 T2.3 | length 421.2
  Bottom Layer w50: S1.2 1907.17,464.96 T2.3
NetS2_2: S2.2 T3.3 | length 775
  Bottom Layer w100: S2.2 T3.3
NetT1_1: T1.1 U2.13 | length 1299.8
  Bottom Layer w20: T1.1 2847.2,795 3212.2,1160 U2.13 U2.13@3212.2,1483.58
NetT1_2: T1.2 U2.14 | length 1299
  Bottom Layer w20: T1.2 2290.35,895 2847.2,895 2897.24,945.04 U2.14
OSCIN: C10.1 R3.2 U1.5 Y1.2 | length 513.7
  Bottom Layer w10: U1.5 3285.79,3588.9 C10.1
  Bottom Layer w20: C10.1 3351.89,3630.31 3427.2,3555 3491.5,3555 Y1.2
OSCOUT: C11.1 R3.1 U1.6 Y1.1 | length 528.9
  Bottom Layer w10: U1.6 3332.68,3569.21 R3.1@3351.89,3550
  Bottom Layer w20: C11.1 3351.89,3470.63 R3.1@3351.89,3544.75 ; R3.1@3351.89,3550 R3.1@3351.89,3544.75 ; Y1.1@3537.2,3474.29 3496.5,3515 3381.64,3515 R3.1@3351.89,3544.75
PI_SCL: I1.3 U3.6 | length 1255.1
  Top Layer w20: I1.3 1337.2,2755 v3(1622.2,2470) ; v3(1707.2,2382.5) 1709.2,2382.5 U3.6
  Bottom Layer w20: v3(1622.2,2470) 1707.2,2385 v3(1707.2,2382.5)
PI_SDA: I1.2 U3.4 | length 1115.1
  Top Layer w20: I1.2 1337.2,2655 v3(1577.2,2415) ; v3(1657.2,2330) 1661.7,2330 U3.4
  Bottom Layer w20: v3(1577.2,2415) 1657.2,2335 v3(1657.2,2330)
PLC: R9.2 U2.9 | length 1954.3
  Top Layer w20: U2.9 3132.2,137.68 3137.2,142.68 3132.2,147.68 3259.53,275 v5(3262.2,275)
  Bottom Layer w20: v5(3262.2,275) 3947.2,275 4636.89,964.68 R9.2
PPM1: R19.1 U6.18 | length 1155.3
  Bottom Layer w20: R19.1 877.52,3870 892.2,3870 937.2,3915 1522.2,3915 1777.2,3660 U6.18
PPM2: R20.1 U6.16 | length 1069.4
  Top Layer w20: v3(937.2,3455) 1537.2,3455 1642.2,3560 v3(1777.2,3560)
  Bottom Layer w20: R20.1 v3(937.2,3455) ; v3(1777.2,3560) U6.16@1898.07,3560
PPM3: R21.1 U6.14 | length 1196.2
  Top Layer w20: v3(939.02,3046.81) 1309.02,3046.81 1722.2,3460 v3(1777.2,3460)
  Bottom Layer w20: R21.1 v3(939.02,3046.81) ; v3(1777.2,3460) U6.14
PPM4: R22.1 U6.12 | length 1455.3
  Top Layer w20: v3(941.61,2629.41) 941.61,2854.41 1042.2,2955 1352.2,2955 1757.2,3360 v3(1777.2,3360)
  Bottom Layer w20: R22.1 v3(941.61,2629.41) ; v3(1777.2,3360) U6.12
PWE: U2.8
RESET: C9.2 R2.1 U1.7 | length 359.8
  Bottom Layer w10: U1.7 3200.07,3549.53 C9.2
  Bottom Layer w20: R2.1 C9.2
RX_JY901: U1.51
RXN: J1.6 R12.2 U2.3 | length 1999.4
  Top Layer w20: U2.3 3939.49,470 4242.2,470 4497.2,725 4497.2,1030.59 4396.16,1131.63 4353.91,1131.63 4275.04,1052.75 J1.6
  Bottom Layer w20: R12.2 4160.67,1145 J1.6
RXP: J1.3 R11.2 U2.4 | length 1996.3
  Top Layer w20: U2.4 3907.2,516.46 4208.66,516.46 4447.2,755 4447.2,808.46 J1.3
  Bottom Layer w20: R11.2 4317.2,1235 4437.2,1115 4437.2,942.8 J1.3
Singal_IN1: IN1.1 R23.1 U6.11 | length 2310.3
  Top Layer w20: IN1.1 402.2,2495 882.2,2495 1052.2,2665 1052.2,2870 1092.2,2910 1377.2,2910 1672.2,3205 v3(1777.2,3310)
  Bottom Layer w20: v3(1777.2,3310) U6.11
  Bottom Layer w50: IN1.1 217.52,2680.31 R23.1
Singal_IN2: IN2.1 R24.1 U6.13 | length 2067.9
  Top Layer w20: IN2.1 398.87,2895 907.2,2895 1017.2,3005 1347.2,3005 1752.2,3410 v3(1777.2,3410)
  Bottom Layer w20: v3(1777.2,3410) U6.13
  Bottom Layer w50: IN2.1 217.52,3076.98 R24.1
Singal_IN3: IN3.1 R25.1 U6.15 | length 1957.2
  Top Layer w20: IN3.1 233.87,3473.33 432.2,3275 1442.2,3275 1677.2,3510 v3(1777.2,3510)
  Bottom Layer w20: v3(1777.2,3510) U6.15
  Bottom Layer w50: IN3.1 217.52,3473.65 R25.1
Singal_IN4: IN4.1 R26.1 U6.17 | length 1876.6
  Top Layer w20: IN4.1 472.2,3610 v3(1777.2,3610)
  Bottom Layer w20: v3(1777.2,3610) U6.17
  Bottom Layer w50: IN4.1 217.52,3865.31 R26.1 R26.1@217.52,3945
SWCLK: SWD1.3 U1.49 | length 3157.1
  Top Layer w12: v4(2762.2,3665) 2857.2,3665 3942.2,2580 3942.2,1875 4067.2,1750 4412.2,1750 SWD1.3
  Bottom Layer w12: U1.49 2759.57,3667.64 v4(2762.2,3665)
SWIO: SWD1.2 U1.46 | length 3037.2
  Top Layer w12: v4(2802.2,3630) 3892.2,2540 3892.2,1845 4052.2,1685 4053.36,1685 4054.36,1686 4376.2,1686 SWD1.2
  Bottom Layer w12: U1.46 2800.47,3628.27 v4(2802.2,3630)
TIM3_CH1: U1.22
TIM3_CH2: U1.23
TIM3_CH3: U1.26
TIM3_CH4: U1.27
TIM4_CH3: U1.61
TIM4_CH4: U1.62
TIM5_CH1: U1.14
TIM5_CH2: U1.15
TIM5_CH3: U1.16
TIM5_CH4: U1.17
TIM8_CH1: U1.37 U6.8 | length 455
  Bottom Layer w8: U6.8 2372.2,3410 2432.2,3470 2601.15,3470 2620.04,3451.1 U1.37
TIM8_CH2: U1.38 U6.6 | length 438.6
  Bottom Layer w8: U6.6 2270.34,3506 2600.29,3506 2635.51,3470.79 U1.38
TIM8_CH3: U1.39 U6.4 | length 471.9
  Bottom Layer w8: U6.4 2521.75,3610 2641.28,3490.47 U1.39
TIM8_CH4: U1.40 U6.2 | length 505.1
  Bottom Layer w8: U6.2 2447.2,3710 2646.87,3510.33 2688.53,3510.33 U1.40
TX_JY901: U1.52
TXN: J1.2 R8.1 U2.5 | length 1434.1
  Top Layer w20: U2.5 3897.01,585 4202.2,585 4275.04,657.83 J1.2
  Bottom Layer w20: R8.1 4211.08,766.67 J1.2
TXP: J1.1 R7.1 U2.6 | length 1361.6
  Top Layer w20: U2.6 3863.27,630 4132.2,630 v5(4172.2,670)
  Bottom Layer w20: R7.1 v5(4172.2,670) 4264.41,670 J1.1
UART1RX_NEO: U1.42 U3.9 | length 1964.5
  Top Layer w12: U3.9 2337.2,1957.65 2337.2,2990 2455.24,3108.04 2797.2,3450 v4(2797.2,3550)
  Bottom Layer w12: U1.42 2796.73,3549.53 v4(2797.2,3550)
UART1TX_NEO: U1.43 U3.7 | length 2004.9
  Top Layer w12: U3.7 2237.2,1957.65 2237.2,2940 2432.24,3135.04 2754.7,3457.5 2762.2,3465 v4(2762.2,3590)
  Bottom Layer w12: U1.43 2741.42,3569.21 v4(2762.2,3590)
pads on no net: J1.7 J1.8 J1.9 J1.10 J1.BO1 J1.BO2 U1.1 U1.2 U1.3 U1.4 U1.9 U1.10 U1.11 U1.20 U1.21 U1.24 U1.25 U1.28 U1.41 U1.44 U1.45 U1.50 U1.53 U1.54 U1.55 U1.56 U1.57 U2.7 U2.15 U2.16 U3.2 U3.8 U3.10 U3.11 U3.12 U3.14 U3.15 U3.16 U3.17 U3.18 U3.20 U3.21 U3.22 U3.23 U3.24 U3.25 U3.27 U3.28 U3.30 U3.31 U3.32 U3.34 U3.35 U3.36 U3.37 U3.38 U3.39 U4.0

## Polygon pours and split planes (outlines as drawn)
GND on Top Layer "Top Layer-No Net" (solid, remove dead copper, pour order 40): -225,4355 -110,4240 5870,4240 5870,-55 5445,-480 5175,-210 -295,-210
GND on Bottom Layer "aa" (solid, remove dead copper, pour order 44): -295,4260 -260,4295 5450,4295 5450,-335 5295,-180 -440,-180

## Keep-outs
Keep-Out Layer:
  circle w3.94: c4032.2,3885 r54.13
  circle w3.94: c1748.74,3885 r54.13
  circle w3.94: c4032.2,1955.87 r54.13
  circle w3.94: c1748.74,1955.87 r54.13
  lines w3.94: 2496.77,2438.15 2496.77,3068.07 3126.69,3068.07 3126.69,2438.15 2496.77,2438.15
  lines w5: 4957.2,1817.87 4957.2,0 0,0 0,4050 4209.37,4050 4209.37,1818.07 4957.4,1818.07

## Silkscreen, mask and mechanical layers (free items; w line width, h text height)
Top Overlay:
  lines w3.94: 4209.37,1818.07 1610.94,1818.07 1610.94,4022.8 4209.37,4022.8
Top Solder:
  lines w100: 209.76,1890.55 385.31,1715 988.78,1715 1077.2,1803.43
Bottom Solder:
  lines w100: 209.76,1890.55 321.65,1890.55 827.2,1385 827.2,815 1117.2,525 ; 217.2,230 682.2,230 ; 217.2,525 217.2,1287.01 ; 252.76,1890.55 625.63,2263.43 1077.2,2263.43 ; 677.2,545 677.2,1299.45 ; 967.2,910.39 967.2,1060 1337.2,690 1337.2,375 1192.2,230 ; 967.2,1237.17 967.2,1382.83 967.2,1605.55 ; 1077.2,1606.57 968.23,1606.57 967.2,1605.55 ; 1077.2,2066.57 858.23,2066.57 682.2,1890.55 967.2,1605.55
Mechanical 1:
  circle w10: c4032.2,3885 r50
  circle w10: c4032.2,1955 r49.5
  circle w10: c1747.2,1955 r53.15
  circle w10: c1747.2,3885 r53.15
  lines w5: 4957.2,1817.87 4957.4,1818.07

## Text inside footprints (layer, text, board x,y; h text height)
J1: Top Overlay "1" at 4489.17,732.79 h27.56 r90; Top Overlay "7" at 4476.1,1113.08 h27.56 r90
U3: Top Overlay "1" at 1785.63,1886.07 h27.56; Top Overlay "2" at 1785.63,1986.07 h27.56; Top Overlay "40" at 3865.63,1986.07 h27.56; Top Overlay "39" at 3865.63,1886.07 h27.56